# Altium PCB Adafruit_TPS61040_Boost_Converter.PcbDoc
Units mil, origin at the board's own origin, x right, y up, seen from the top; angles counter-clockwise.
Board outline 400 x 600 mil, 2 copper layers (Top, Bottom); 14 components, 6 nets, 27 pads, 10 vias.
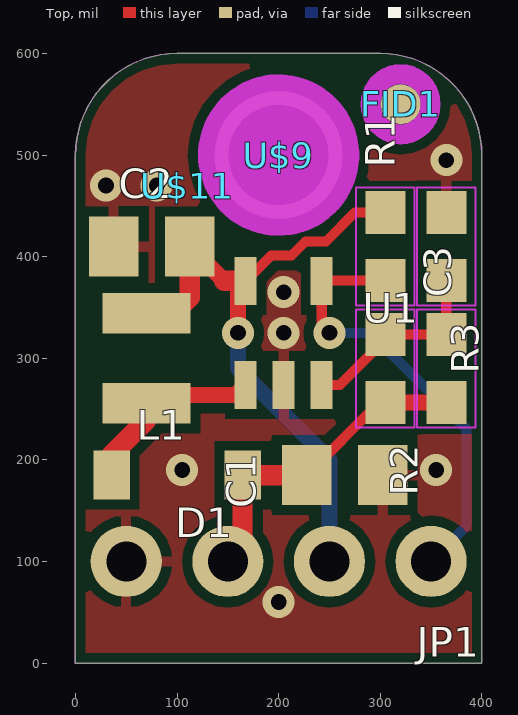
[diagram p0: Top view]
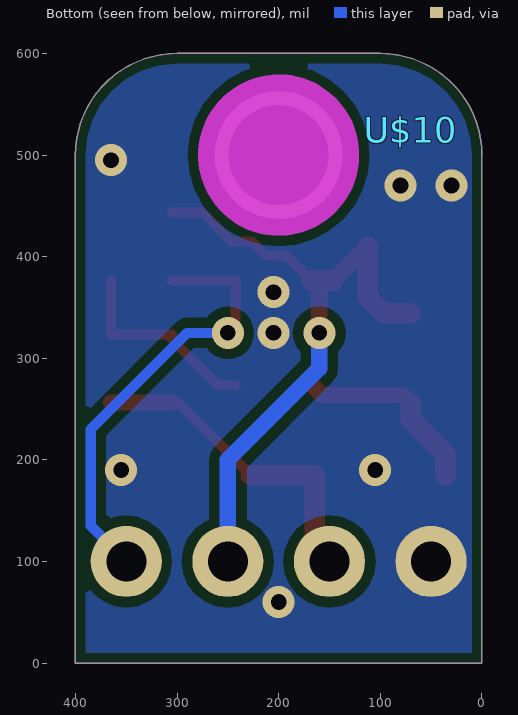
[diagram p1: Bottom view, seen from below]

## Layer stack, top to bottom
Top Solder: solder mask 0.4, Solder Resist, Dk 3.5
Top: signal copper 1.378
Dielectric 1: dielectric 12.6, FR-4, Dk 4.8
Bottom: signal copper 1.378
Bottom Solder: solder mask 0.4, Solder Resist, Dk 3.5

## Board outline
400,0 0,0 0,500 cw(c100,500) 100,600 300,600 cw(c300,500) 400,500

## Design rules (kind name [scope] priority, off if disabled: settings)
BoardOutlineClearance mdCopperDimension [All] p1: gap=10 ignorepadtopadclearanceinfootprint=FALSE except(0: Arc-SplitContinuation Track-SplitContinuation SMDPad-SplitContinuation THPad-SplitContinuation Via-SplitContinuation Fill-SplitContinuation Poly-SplitContinuation Region-SplitContinuation Text-SplitContinuation)
Clearance Clearance_for_PolygonClass_Isolate_10 [InPolygonClass('Isolate_10') vs IsArc Or IsTrack Or IsPad Or IsVia Or IsFill Or IsRegion Or IsText] p1: gap=10 ignorepadtopadclearanceinfootprint=FALSE
Clearance "Clearance (Same Net)" [All] p2: gap=8 ignorepadtopadclearanceinfootprint=FALSE
Clearance [All] p3: gap=8 ignorepadtopadclearanceinfootprint=FALSE
HoleSize [All] p1: absolutevalues=TRUE maxlimit=100000 minlimit=15.5 maxpercent=80.000 minpercent=20.000
HoleToHoleClearance mdDrill [All] p1: gap=8 allowstackedmicrovias=TRUE
MinimumSolderMaskSliver [All] p1 off: minsoldermaskwidth=10
PasteMaskExpansion Expansion_SMDPaste_OFF [InPadClass('SMDPaste_OFF')] p1: expansion=0
PasteMaskExpansion mlMinCreamFrame [All] p2: expansion=0
PolygonConnect PolygonConnect_For_PolygonThermal_ON_Width100000_Gap100000 [InPolygonClass('PolygonThermal_ON_Width100000_Gap100000') vs Not IsVia] p1: connectstyle=Relief reliefconductorwidth=10 reliefentries=4 polygonreliefangle="90 Angle" airgapwidth=10
PolygonConnect ThermalVias [IsVia] p2: connectstyle=Direct reliefconductorwidth=10 reliefentries=4 polygonreliefangle="90 Angle" airgapwidth=10
PolygonConnect [All] p3: connectstyle=Relief reliefconductorwidth=10 reliefentries=4 polygonreliefangle="90 Angle" airgapwidth=10
RoutingVias [All] p1: holewidth=15.5 width=31.5 viastyle="Through Hole" minholewidth=15.5 minwidth=31.5 maxholewidth=100 maxwidth=100
SolderMaskExpansion mlMinStopFrame [All] p1: expansion=2 istentingtop=FALSE
Width [All] p1: maxlimit=10 minlimit=8 preferedwidth=8
26 further rules are at their usual default settings.

## Classes and differential pairs
polygon class PolygonThermal_ON_Width100000_Gap100000: Polygon_1_Net_GND Polygon_2_Net_GND
polygon class Isolate_10: Polygon_1_Net_GND Polygon_2_Net_GND
pad class SMDPaste_OFF: FID1-1

## Components (designator, comment, footprint, x,y, rotation, side; value= is the part's Value field where it differs from the comment)
C1 "10uF/16V" 0805-NO 265,185 r0 top
C2 "22uF" 0805-NO 75,410 r180 top
C3 "22pF" 0603-NO 365,290 r90 top
D1 "MBR120" SOD-123FL 100,185 r180 top
FID1 "" FIDUCIAL_1MM 320,550 r0 top
JP1 "" 1X04_ROUND 200,100 r180 top
L1 "MPL2520S100MWT" INDUCTOR_1007 70,300 r270 top
R1 "100K" 0603-NO 305,410 r270 top
R2 "875K" 0603-NO 305,290 r270 top
R3 "100K" 0603-NO 365,410 r270 top
U1 "TPS61040" SOT23-5 205,325 r0 top
U$9 "" MOUNTINGHOLE_2.5_PLATED 200,500 r0 top
U$10 "" PCBFEAT-REV-040 70,525 r180 bottom
U$11 "" ADAFRUIT_2.5MM 110,470 r90 top

## Footprints (in the part's own frame and the unit in brackets; to place one, negate y for a bottom-side part, rotate by r counter-clockwise, add the part's x,y. Pads: shape width x height; smd on the part's side, far side on the other; paste and mask are expansions set on the pad)
1X04_ROUND [mil] "1X04_ROUND"
  round 70 hole 39.37: 1(-150,0) 2(-50,0) 3(50,0) 4(150,0)
  body extent -204,-35 185,35, height 150
0603-NO [mm] "0603-NO"
  rect 1.075x1 smd: 1(-0.85,0) 2(0.85,0)
  Top keep-out lines w0.051: -1.473,0.729 -1.473,-0.729 1.473,-0.729 1.473,0.729 -1.473,0.729
  body extent -1.5,-0.76 1.5,0.76, height 3.81
0805-NO [mil] "0805-NO"
  rect 48.82x59.06 smd: 1(-37.4,0) 2(37.4,0)
  body extent -62,-30 62,30, height 150
ADAFRUIT_2.5MM [mil] "ADAFRUIT_2.5MM"
FIDUCIAL_1MM [mm] "FIDUCIAL_1MM"
  rrect100% 1x1 smd paste+0: 1(0,0)
  Top keep-out lines w0.483: -0.75,0 ccw(c0,0) 0,-0.75 ccw(c0,0) 0.75,0 ccw(c0,0) 0,0.75 ccw(c0,0) -0.75,0
  Top keep-out lines w0.5: -0.75,0 ccw(c0,0) 0,-0.75 ccw(c0,0) 0.75,0 ccw(c0,0) 0,0.75 ccw(c0,0) -0.75,0
  body extent -1.01,-1.01 1.01,1.01, height 3.81
INDUCTOR_1007 [mil] "INDUCTOR_1007"
  rect 40x86.61 smd: P$1(-44.37,0) P$2(44.37,0)
  body extent -64,-43 64,43, height 150
MOUNTINGHOLE_2.5_PLATED [mil] "MOUNTINGHOLE_2.5_PLATED"
  round 125.98 hole 98.43: P$1(0,0)
  Top keep-out circle w80: c0,0 r39.37
  Top keep-out circle w80: c0,0 r39.37
  Bottom keep-out circle w80: c0,0 r39.37
  Bottom keep-out circle w80: c0,0 r39.37
  body extent -80,-80 80,80, height 150
PCBFEAT-REV-040 [mil] "PCBFEAT-REV-040"
SOD-123FL [mil] "SOD-123FL"
  rect 35.83x48.03 smd: A(64.47,0) C(-64.47,0)
  body extent -82,-35 82,35, height 150
SOT23-5 [mil] "SOT23-5"
  rect 21.65x47.24 smd: 1(-37.4,-51.19) 2(0,-51.19) 3(37.4,-51.19) 4(37.4,51.19) 5(-37.4,51.19)
  body extent -60,-75 60,75, height 150

## Part data
C1 C2: library part 0805-NO, PackageName=0805-NO
C3 R1 R2 R3: library part 0603-NO, PackageName=0603-NO
D1: library part SOD-123FL, PackageName=SOD-123FL
FID1: library part FIDUCIAL_1MM, PackageName=FIDUCIAL_1MM
JP1: library part 1X04_ROUND, PackageName=1X04_ROUND
L1: library part INDUCTOR_1007, PackageName=INDUCTOR_1007
U1: library part SOT23-5, PackageName=SOT23-5
U$9: library part MOUNTINGHOLE_2.5_PLATED, PackageName=MOUNTINGHOLE_2.5_PLATED
U$10: library part PCBFEAT-REV-040, PackageName=PCBFEAT-REV-040
U$11: library part ADAFRUIT_2.5MM, PackageName=ADAFRUIT_2.5MM

## Via types
v1: diameter 31.5/31.5 (per signal layer), hole 15.5, Top to Bottom, 10 vias

## Nets (pads, with @x,y where several pads share a name; then routed paths per layer and width w, separated by ;. In a path a pad name is that pad's centre, name@x,y a point inside that pad or via, vN(x,y) a via of type N, cw(c..) or ccw(c..) an arc to the next point about the centre after c; other vN are vias at no path point)
EN: JP1.1 R1.2 U1.4 | length 435.9
  Top w10: v1(250,325) 242.4,332.6 U1.4 242.75,376.54 R1.2
  Bottom w10: v1(250,325) 290,325 385,230 385,135 JP1.1
FB: C3.2 R2.1 R3.2 U1.3 | length 199.2
  Top w10: U1.3 260.35,273.82 305,318.46 R2.1 C3.2 R3.2
GND: C1.2 C2.2 JP1.4 R3.1 U1.2
  other v1: 200,60 105,190 355,190 205,325 205,365 30,470 80,470 365,495
N$1: D1.A L1.P$2 U1.1 | length 190
  Top w16: L1.P$2 78.19,263.82 157.6,263.82 U1.1
  Top w20: D1.A 35.53,205 70,239.47 L1.P$2
V+: C1.1 C3.1 D1.C JP1.3 R2.2 | length 321.2
  Top w10: C1.1 299.13,256.54 R2.2
  Top w16: R2.2 C3.1
  Top w20: JP1.3 164.47,114.47 D1.C C1.1
VIN: C2.1 JP1.2 L1.P$1 R1.1 U1.5 | length 650
  Top w10: U1.5 192.6,401.19 212.6,401.19 226.41,415 246.54,415 275,443.46 R1.1
  Top w16: C2.1 146.22,376.19 ; v1(160,325) 160,368.59 U1.5
  Top w20: L1.P$1 96.77,344.37 112.4,360 C2.1 ; 146.22,376.19 U1.5
  Bottom w16: v1(160,325) 160,290 250,200 JP1.2
pads on no net: FID1.1 U$9.P$1

## Polygon pours and split planes (outlines as drawn)
GND on Top "Polygon_1_Net_GND" (solid, remove dead copper, pour order 1): -5,-5 -5,605 405,605 405,-5
GND on Bottom "Polygon_2_Net_GND" (solid, remove dead copper, pour order 0): -5,-5 -5,605 405,605 405,-5

## Keep-outs
Keep-Out Layer:
  the board outline again, w0

## Silkscreen, mask and mechanical layers (free items; w line width, h text height)
Dimension:
  the board outline again, w0
tPlace:
  text "G" at 32.97,21.33 h54.25
  text "12V" at 104.01,19.39 h62
  text "In" at 226.81,19.39 h62
  text "En" at 324.94,19.39 h62
bPlace:
  text "Vin: 2-6V" at 342.27,349.39 h62
  text "Vout: 12V" at 342.27,289.39 h62
  text "@3.3V: 40mA" at 372.44,229.39 h62
  text "@5V: 80mA" at 339.62,169.39 h62
  text "TPS61040" at 336.97,17.45 h69.75

## Text inside footprints (layer, text, board x,y; h text height)
U$10: tPlace ">REV" at 84,505 h62